# Altium PCB led_2835_curve_45X45cm.PcbDoc
Units mm, origin at the board's own origin, x right, y up, seen from the top; angles counter-clockwise.
Board outline 450 x 225 mm, 2 copper layers (Top Layer, Bottom Layer); 74 components, 68 nets, 148 pads, 0 vias.
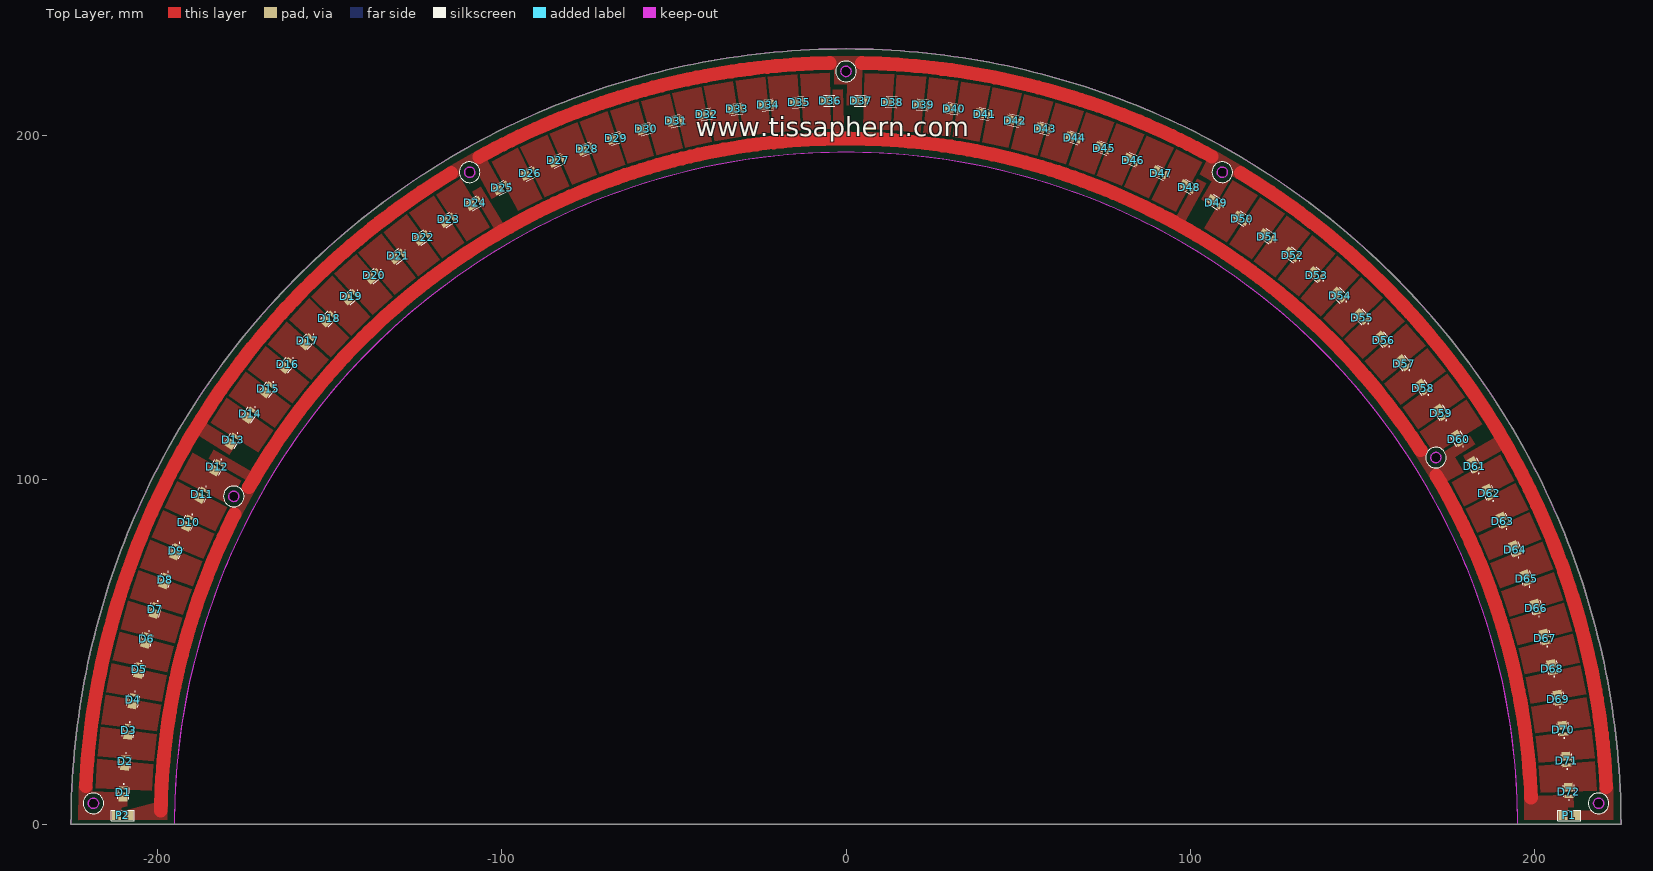
[diagram p0: Top Layer view]
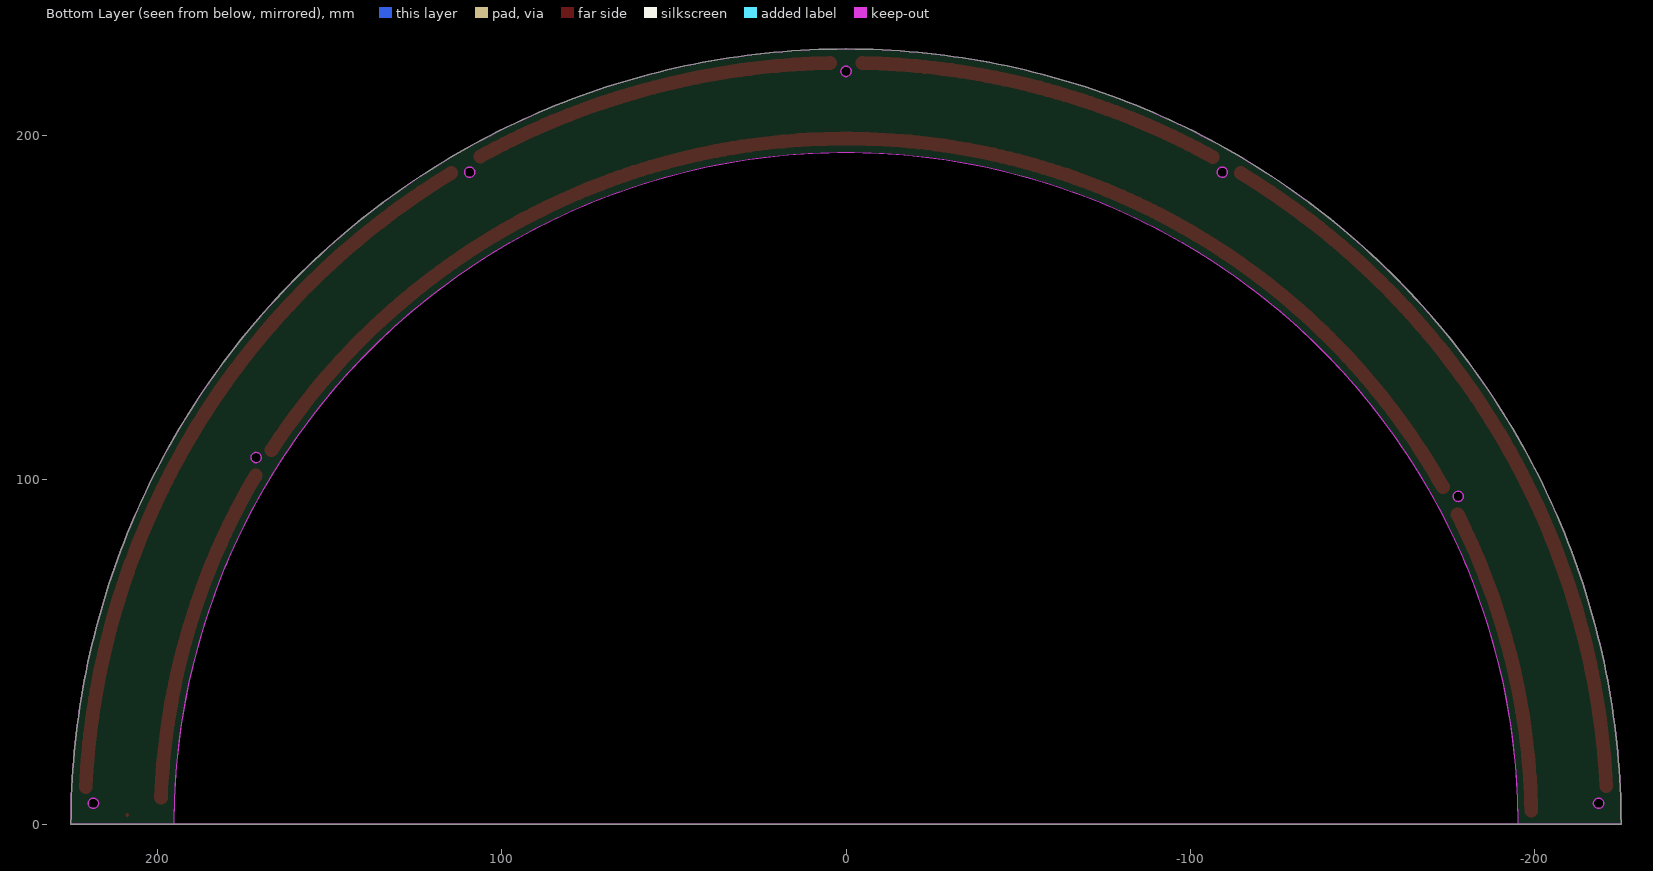
[diagram p1: Bottom Layer view, seen from below]

## Layer stack, top to bottom
Top Solder: solder mask 0.0102, Solder Resist, Dk 3.5
Top Layer: signal copper 0.0356
Dielectric 1: dielectric 0.32, FR-4, Dk 4.8
Bottom Layer: signal copper 0.0356
Bottom Solder: solder mask 0.0102, Solder Resist, Dk 3.5

## Board outline
-225,0 225,0 ccw(c0,0)
cut-out: -195,0 195,0 195,2.188 194.902,6.563 194.705,10.934 194.411,15.3 194.019,19.659 193.529,24.007 192.942,28.344 192.257,32.666 191.476,36.971 190.598,41.258 189.624,45.525 188.555,49.768 187.391,53.986 186.132,58.177 184.78,62.339 183.335,66.47 181.797,70.567 180.168,74.628 178.448,78.652 176.638,82.636 174.74,86.579 172.753,90.478 170.679,94.331 168.52,98.137 166.275,101.894 163.947,105.599 161.536,109.251 159.044,112.848 156.472,116.388 153.821,119.87 151.093,123.291 148.288,126.65 145.409,129.946 142.457,133.176 139.433,136.339 136.339,139.433 133.176,142.457 129.946,145.409 126.65,148.288 123.291,151.093 119.87,153.821 116.388,156.472 112.848,159.044 109.251,161.536 105.599,163.947 101.894,166.275 98.137,168.52 94.331,170.679 90.478,172.753 86.579,174.74 82.636,176.638 78.652,178.448 74.628,180.168 70.567,181.797 66.47,183.335 62.339,184.78 58.177,186.132 53.986,187.391 49.768,188.555 45.525,189.624 41.258,190.598 36.971,191.476 32.666,192.257 28.344,192.942 24.007,193.529 19.659,194.019 15.3,194.411 10.934,194.705 6.563,194.902 2.188,195 -2.188,195 -6.563,194.902 -10.934,194.705 -15.3,194.411 -19.659,194.019 -24.007,193.529 -28.344,192.942 -32.666,192.257 -36.971,191.476 -41.258,190.598 -45.525,189.624 -49.768,188.555 -53.986,187.391 -58.177,186.132 -62.339,184.78 -66.47,183.335 -70.567,181.797 -74.628,180.168 -78.652,178.448 -82.636,176.638 -86.579,174.74 -90.478,172.753 -94.331,170.679 -98.137,168.52 -101.894,166.275 -105.599,163.947 -109.251,161.536 -112.848,159.044 -116.388,156.472 -119.87,153.821 -123.291,151.093 -126.65,148.288 -129.946,145.409 -133.176,142.457 -136.339,139.433 -139.433,136.339 -142.457,133.176 -145.409,129.946 -148.288,126.65 -151.093,123.291 -153.821,119.87 -156.472,116.388 -159.044,112.848 -161.536,109.251 -163.947,105.599 -166.275,101.894 -168.52,98.137 -170.679,94.331 -172.753,90.478 -174.74,86.579 -176.638,82.636 -178.448,78.652 -180.168,74.628 -181.797,70.567 -183.335,66.47 -184.78,62.339 -186.132,58.177 -187.391,53.986 -188.555,49.768 -189.624,45.525 -190.598,41.258 -191.476,36.971 -192.257,32.666 -192.942,28.344 -193.529,24.007 -194.019,19.659 -194.411,15.3 -194.705,10.934 -194.902,6.563 -195,2.188
cut-out: -176.455,94.371 -176.529,94.243 -176.724,94.021 -176.958,93.841 -177.223,93.71 -177.509,93.634 -177.803,93.614 -178.096,93.653 -178.376,93.748 -178.504,93.822 -178.632,93.896 -178.854,94.09 -179.034,94.325 -179.165,94.59 -179.241,94.875 -179.261,95.17 -179.222,95.463 -179.127,95.743 -179.053,95.871 -178.979,95.999 -178.784,96.221 -178.55,96.401 -178.285,96.531 -178,96.608 -177.705,96.627 -177.412,96.589 -177.132,96.494 -177.004,96.42 -176.876,96.346 -176.654,96.151 -176.474,95.917 -176.343,95.652 -176.267,95.366 -176.248,95.072 -176.286,94.779 -176.381,94.499
cut-out: 169.955,105.629 169.881,105.757 169.786,106.037 169.748,106.33 169.767,106.625 169.843,106.91 169.974,107.175 170.154,107.41 170.376,107.604 170.504,107.678 170.632,107.752 170.912,107.847 171.205,107.886 171.5,107.866 171.785,107.79 172.05,107.659 172.284,107.479 172.479,107.257 172.553,107.129 172.627,107.001 172.722,106.721 172.761,106.428 172.741,106.134 172.665,105.848 172.534,105.583 172.354,105.349 172.132,105.154 172.004,105.08 171.876,105.006 171.596,104.911 171.303,104.873 171.009,104.892 170.723,104.969 170.458,105.099 170.224,105.279 170.029,105.501
cut-out: 217,6 217,6.148 217.058,6.438 217.171,6.711 217.335,6.956 217.544,7.165 217.789,7.329 218.062,7.442 218.352,7.5 218.5,7.5 218.648,7.5 218.938,7.442 219.211,7.329 219.456,7.165 219.665,6.956 219.829,6.711 219.942,6.438 220,6.148 220,6 220,5.852 219.942,5.562 219.829,5.289 219.665,5.044 219.456,4.835 219.211,4.671 218.938,4.558 218.648,4.5 218.5,4.5 218.352,4.5 218.062,4.558 217.789,4.671 217.544,4.835 217.335,5.044 217.171,5.289 217.058,5.562 217,5.852
cut-out: 108.5,187.928 108.372,188.001 108.15,188.196 107.97,188.431 107.839,188.696 107.763,188.981 107.744,189.276 107.782,189.569 107.877,189.849 107.951,189.977 108.025,190.104 108.22,190.327 108.454,190.507 108.719,190.637 109.004,190.714 109.299,190.733 109.592,190.694 109.872,190.599 110,190.526 110.128,190.452 110.35,190.257 110.53,190.022 110.661,189.757 110.737,189.472 110.756,189.177 110.718,188.884 110.623,188.604 110.549,188.477 110.475,188.349 110.28,188.126 110.046,187.947 109.781,187.816 109.496,187.739 109.201,187.72 108.908,187.759 108.628,187.854
cut-out: 0,217 -0.148,217 -0.438,217.058 -0.711,217.171 -0.956,217.335 -1.165,217.544 -1.329,217.789 -1.442,218.062 -1.5,218.352 -1.5,218.5 -1.5,218.648 -1.442,218.938 -1.329,219.211 -1.165,219.456 -0.956,219.665 -0.711,219.829 -0.438,219.942 -0.148,220 0,220 0.148,220 0.438,219.942 0.711,219.829 0.956,219.665 1.165,219.456 1.329,219.211 1.442,218.938 1.5,218.648 1.5,218.5 1.5,218.352 1.442,218.062 1.329,217.789 1.165,217.544 0.956,217.335 0.711,217.171 0.438,217.058 0.148,217
cut-out: -217,6 -217,5.852 -217.058,5.562 -217.171,5.289 -217.335,5.044 -217.544,4.835 -217.789,4.671 -218.062,4.558 -218.352,4.5 -218.5,4.5 -218.648,4.5 -218.938,4.558 -219.211,4.671 -219.456,4.835 -219.665,5.044 -219.829,5.289 -219.942,5.562 -220,5.852 -220,6 -220,6.148 -219.942,6.438 -219.829,6.711 -219.665,6.956 -219.456,7.165 -219.211,7.329 -218.938,7.442 -218.648,7.5 -218.5,7.5 -218.352,7.5 -218.062,7.442 -217.789,7.329 -217.544,7.165 -217.335,6.956 -217.171,6.711 -217.058,6.438 -217,6.148
cut-out: -108.5,187.928 -108.628,187.854 -108.908,187.759 -109.201,187.72 -109.496,187.739 -109.781,187.816 -110.046,187.947 -110.28,188.126 -110.475,188.349 -110.549,188.477 -110.623,188.604 -110.718,188.884 -110.756,189.177 -110.737,189.472 -110.661,189.757 -110.53,190.022 -110.35,190.257 -110.128,190.452 -110,190.526 -109.872,190.599 -109.592,190.694 -109.299,190.733 -109.004,190.714 -108.719,190.637 -108.454,190.507 -108.22,190.327 -108.025,190.104 -107.951,189.977 -107.877,189.849 -107.782,189.569 -107.744,189.276 -107.763,188.981 -107.839,188.696 -107.97,188.431 -108.15,188.196 -108.372,188.001
cut-out: 0,217 -0.148,217 -0.438,217.058 -0.711,217.171 -0.956,217.335 -1.165,217.544 -1.329,217.789 -1.442,218.062 -1.5,218.352 -1.5,218.5 -1.5,218.648 -1.442,218.938 -1.329,219.211 -1.165,219.456 -0.956,219.665 -0.711,219.829 -0.438,219.942 -0.148,220 0,220 0.148,220 0.438,219.942 0.711,219.829 0.956,219.665 1.165,219.456 1.329,219.211 1.442,218.938 1.5,218.648 1.5,218.5 1.5,218.352 1.442,218.062 1.329,217.789 1.165,217.544 0.956,217.335 0.711,217.171 0.438,217.058 0.148,217

## Design rules (kind name [scope] priority, off if disabled: settings)
Clearance [All] p1: gap=0.254 ignorepadtopadclearanceinfootprint=FALSE except(0: Arc-Hole Track-Hole SMDPad-Hole THPad-Hole Via-Hole Fill-Hole Poly-Hole Region-Hole Text-Hole)
PolygonConnect PolygonConnect_2 [All vs IsNamedPolygon('NONET_L-01_P-001')] p1: connectstyle=Direct reliefconductorwidth=0.254 reliefentries=4 polygonreliefangle="90 Angle" airgapwidth=0.254
PolygonConnect PolygonConnect_1 [All vs IsNamedPolygon('NONET_L-01_P-001')] p2: connectstyle=Relief reliefconductorwidth=2.55 reliefentries=4 polygonreliefangle="90 Angle" airgapwidth=0.2
PolygonConnect [All] p3: connectstyle=Relief reliefconductorwidth=0.254 reliefentries=4 polygonreliefangle="90 Angle" airgapwidth=0.254
RoutingVias [All] p1: holewidth=0.711 width=1.27 viastyle="Through Hole" minholewidth=0.711 minwidth=1.27 maxholewidth=0.711 maxwidth=1.27
SolderMaskExpansion [All] p1: expansion=0.102 istentingtop=FALSE
Width [All] p1: maxlimit=10 minlimit=0.254 preferedwidth=0.254
30 further rules are at their usual default settings.

## Components (designator, comment, footprint, x,y, rotation, side; value= is the part's Value field where it differs from the comment)
D1 "OF-SMD2835Y" LED_OF-SMD2835Y -209.8,9.16 r267.5 top
D2 "OF-SMD2835Y" LED_OF-SMD2835Y -209.212,18.171 r265.04 top
D3 "OF-SMD2835Y" LED_OF-SMD2835Y -208.238,27.149 r262.57 top
D4 "OF-SMD2835Y" LED_OF-SMD2835Y -206.878,36.076 r260.11 top
D5 "OF-SMD2835Y" LED_OF-SMD2835Y -205.136,44.937 r257.64 top
D6 "OF-SMD2835Y" LED_OF-SMD2835Y -203.014,53.714 r255.18 top
D7 "OF-SMD2835Y" LED_OF-SMD2835Y -200.517,62.393 r252.72 top
D8 "OF-SMD2835Y" LED_OF-SMD2835Y -197.649,70.956 r250.25 top
D9 "OF-SMD2835Y" LED_OF-SMD2835Y -194.416,79.387 r247.79 top
D10 "OF-SMD2835Y" LED_OF-SMD2835Y -190.823,87.672 r245.32 top
D11 "OF-SMD2835Y" LED_OF-SMD2835Y -186.878,95.795 r242.86 top
D12 "OF-SMD2835Y" LED_OF-SMD2835Y -182.587,103.741 r240.4 top
D13 "OF-SMD2835Y" LED_OF-SMD2835Y -177.958,111.494 r237.93 top
D14 "OF-SMD2835Y" LED_OF-SMD2835Y -173,119.042 r235.47 top
D15 "OF-SMD2835Y" LED_OF-SMD2835Y -167.722,126.369 r233 top
D16 "OF-SMD2835Y" LED_OF-SMD2835Y -162.134,133.463 r230.54 top
D17 "OF-SMD2835Y" LED_OF-SMD2835Y -156.247,140.31 r228.08 top
D18 "OF-SMD2835Y" LED_OF-SMD2835Y -150.07,146.898 r225.61 top
D19 "OF-SMD2835Y" LED_OF-SMD2835Y -143.616,153.214 r223.15 top
D20 "OF-SMD2835Y" LED_OF-SMD2835Y -136.896,159.246 r220.68 top
D21 "OF-SMD2835Y" LED_OF-SMD2835Y -129.923,164.985 r218.22 top
D22 "OF-SMD2835Y" LED_OF-SMD2835Y -122.71,170.418 r215.76 top
D23 "OF-SMD2835Y" LED_OF-SMD2835Y -115.27,175.536 r213.29 top
D24 "OF-SMD2835Y" LED_OF-SMD2835Y -107.617,180.329 r210.83 top
D25 "OF-SMD2835Y" LED_OF-SMD2835Y -99.765,184.789 r208.36 top
D26 "OF-SMD2835Y" LED_OF-SMD2835Y -91.728,188.907 r205.9 top
D27 "OF-SMD2835Y" LED_OF-SMD2835Y -83.522,192.676 r203.44 top
D28 "OF-SMD2835Y" LED_OF-SMD2835Y -75.161,196.089 r200.97 top
D29 "OF-SMD2835Y" LED_OF-SMD2835Y -66.662,199.139 r198.51 top
D30 "OF-SMD2835Y" LED_OF-SMD2835Y -58.039,201.82 r196.04 top
D31 "OF-SMD2835Y" LED_OF-SMD2835Y -49.309,204.129 r193.58 top
D32 "OF-SMD2835Y" LED_OF-SMD2835Y -40.487,206.06 r191.12 top
D33 "OF-SMD2835Y" LED_OF-SMD2835Y -31.591,207.61 r188.65 top
D34 "OF-SMD2835Y" LED_OF-SMD2835Y -22.636,208.776 r186.19 top
D35 "OF-SMD2835Y" LED_OF-SMD2835Y -13.64,209.557 r183.72 top
D36 "OF-SMD2835Y" LED_OF-SMD2835Y -4.618,209.949 r181.26 top
D37 "OF-SMD2835Y" LED_OF-SMD2835Y 4.413,209.954 r178.8 top
D38 "OF-SMD2835Y" LED_OF-SMD2835Y 13.435,209.57 r176.33 top
D39 "OF-SMD2835Y" LED_OF-SMD2835Y 22.432,208.798 r173.87 top
D40 "OF-SMD2835Y" LED_OF-SMD2835Y 31.388,207.641 r171.4 top
D41 "OF-SMD2835Y" LED_OF-SMD2835Y 40.286,206.1 r168.94 top
D42 "OF-SMD2835Y" LED_OF-SMD2835Y 49.109,204.177 r166.48 top
D43 "OF-SMD2835Y" LED_OF-SMD2835Y 57.842,201.877 r164.01 top
D44 "OF-SMD2835Y" LED_OF-SMD2835Y 66.467,199.204 r161.55 top
D45 "OF-SMD2835Y" LED_OF-SMD2835Y 74.97,196.162 r159.08 top
D46 "OF-SMD2835Y" LED_OF-SMD2835Y 83.334,192.758 r156.62 top
D47 "OF-SMD2835Y" LED_OF-SMD2835Y 91.544,188.997 r154.16 top
D48 "OF-SMD2835Y" LED_OF-SMD2835Y 99.584,184.886 r151.69 top
D49 "OF-SMD2835Y" LED_OF-SMD2835Y 107.441,180.434 r149.23 top
D50 "OF-SMD2835Y" LED_OF-SMD2835Y 115.099,175.648 r146.76 top
D51 "OF-SMD2835Y" LED_OF-SMD2835Y 122.544,170.538 r144.3 top
D52 "OF-SMD2835Y" LED_OF-SMD2835Y 129.762,165.112 r141.84 top
D53 "OF-SMD2835Y" LED_OF-SMD2835Y 136.74,159.38 r139.37 top
D54 "OF-SMD2835Y" LED_OF-SMD2835Y 143.466,153.354 r136.91 top
D55 "OF-SMD2835Y" LED_OF-SMD2835Y 149.926,147.044 r134.44 top
D56 "OF-SMD2835Y" LED_OF-SMD2835Y 156.109,140.463 r131.98 top
D57 "OF-SMD2835Y" LED_OF-SMD2835Y 162.004,133.622 r129.52 top
D58 "OF-SMD2835Y" LED_OF-SMD2835Y 167.599,126.533 r127.05 top
D59 "OF-SMD2835Y" LED_OF-SMD2835Y 172.884,119.211 r124.59 top
D60 "OF-SMD2835Y" LED_OF-SMD2835Y 177.849,111.668 r122.12 top
D61 "OF-SMD2835Y" LED_OF-SMD2835Y 182.485,103.919 r119.66 top
D62 "OF-SMD2835Y" LED_OF-SMD2835Y 186.784,95.978 r117.2 top
D63 "OF-SMD2835Y" LED_OF-SMD2835Y 190.738,87.859 r114.73 top
D64 "OF-SMD2835Y" LED_OF-SMD2835Y 194.339,79.577 r112.27 top
D65 "OF-SMD2835Y" LED_OF-SMD2835Y 197.58,71.149 r109.8 top
D66 "OF-SMD2835Y" LED_OF-SMD2835Y 200.456,62.589 r107.34 top
D67 "OF-SMD2835Y" LED_OF-SMD2835Y 202.962,53.913 r104.88 top
D68 "OF-SMD2835Y" LED_OF-SMD2835Y 205.092,45.137 r102.41 top
D69 "OF-SMD2835Y" LED_OF-SMD2835Y 206.843,36.278 r99.95 top
D70 "OF-SMD2835Y" LED_OF-SMD2835Y 208.211,27.352 r97.48 top
D71 "OF-SMD2835Y" LED_OF-SMD2835Y 209.194,18.376 r95.02 top
D72 "OF-SMD2835Y" LED_OF-SMD2835Y 209.791,9.365 r92.56 top
P1 "Header 2" HDR1X2_SMD 210,2.5 r180 top
P2 "Header 2" HDR1X2_SMD -210,2.5 r0 top

## Footprints (in the part's own frame and the unit in brackets; to place one, negate y for a bottom-side part, rotate by r counter-clockwise, add the part's x,y. Pads: shape width x height; smd on the part's side, far side on the other; paste and mask are expansions set on the pad)
HDR1X2_SMD [mm] "Connector; Header; 2 Position"
  rect 2.6x2.55 smd: 1(-1.778,0) 2(1.778,0)
  silkscreen extent -3.33,-1.5 3.33,1.5
LED_OF-SMD2835Y [mm]
  rect 2.6x2.55 smd: A(1.325,0)
  rect 1x2.55 smd: C(-1.325,0)
  silkscreen extent -2.52,-1.6 1.92,1.59

## Part data
D1 D2 D3 D4 D5 D6 D7 D8 D9 D10 D11 D12 D13 D14 D15 D16 D17 D18 D19 D20 D21 D22 D23 D24 D25 D26 D27 D28 D29 D30 D31 D32 D33 D34 D35 D36 D37 D38 D39 D40 D41 D42 D43 D44 D45 D46 D47 D48 D49 D50 D51 D52 D53 D54 D55 D56 D57 D58 D59 D60 D61 D62 D63 D64 D65 D66 D67 D68 D69 D70 D71 D72: "LED; SMD; 2835, PLCC2; yellow; 2200-2800mcd; 2.8x3.5x0.75mm; 120Â°"
P1 P2: "Header, 2-Pin"

## Nets (pads, with @x,y where several pads share a name; then routed paths per layer and width w, separated by ;. In a path a pad name is that pad's centre, name@x,y a point inside that pad or via, vN(x,y) a via of type N, cw(c..) or ccw(c..) an arc to the next point about the centre after c; other vN are vias at no path point)
GND: D12.C D24.C D36.C D48.C D60.C D72.C P1.2 P2.2 | length 596.2
  Top Layer w1: P1.2@208.73,2.5 P1.2@208.73,2.635
  Top Layer w4: -198.963,3.85 cw(c0,0) -177.549,89.873 ; -173.297,97.821 cw(c0,0) 166.774,108.57 ; 171.346,101.237 cw(c0.022,0) 198.875,7.637
NetD1_C: D1.C D2.A
NetD2_C: D2.C D3.A
NetD3_C: D3.C D4.A
NetD4_C: D4.C D5.A
NetD5_C: D5.C D6.A
NetD6_C: D6.C D7.A
NetD7_C: D7.C D8.A
NetD8_C: D8.C D9.A
NetD9_C: D9.C D10.A
NetD10_C: D10.C D11.A
NetD11_C: D11.C D12.A
NetD13_C: D13.C D14.A
NetD14_C: D14.C D15.A
NetD15_C: D15.C D16.A
NetD16_C: D16.C D17.A
NetD17_C: D17.C D18.A
NetD18_C: D18.C D19.A
NetD19_C: D19.C D20.A
NetD20_C: D20.C D21.A
NetD21_C: D21.C D22.A
NetD22_C: D22.C D23.A
NetD23_C: D23.C D24.A
NetD25_C: D25.C D26.A
NetD26_C: D26.C D27.A
NetD27_C: D27.C D28.A
NetD28_C: D28.C D29.A
NetD29_C: D29.C D30.A
NetD30_C: D30.C D31.A
NetD31_C: D31.C D32.A
NetD32_C: D32.C D33.A
NetD33_C: D33.C D34.A
NetD34_C: D34.C D35.A
NetD35_C: D35.C D36.A
NetD37_C: D37.C D38.A
NetD38_C: D38.C D39.A
NetD39_C: D39.C D40.A
NetD40_C: D40.C D41.A
NetD41_C: D41.C D42.A
NetD42_C: D42.C D43.A
NetD43_C: D43.C D44.A
NetD44_C: D44.C D45.A
NetD45_C: D45.C D46.A
NetD46_C: D46.C D47.A
NetD47_C: D47.C D48.A
NetD49_C: D49.C D50.A
NetD50_C: D50.C D51.A
NetD51_C: D51.C D52.A
NetD52_C: D52.C D53.A
NetD53_C: D53.C D54.A
NetD54_C: D54.C D55.A
NetD55_C: D55.C D56.A
NetD56_C: D56.C D57.A
NetD57_C: D57.C D58.A
NetD58_C: D58.C D59.A
NetD59_C: D59.C D60.A
NetD61_C: D61.C D62.A
NetD62_C: D62.C D63.A
NetD63_C: D63.C D64.A
NetD64_C: D64.C D65.A
NetD65_C: D65.C D66.A
NetD66_C: D66.C D67.A
NetD67_C: D67.C D68.A
NetD68_C: D68.C D69.A
NetD69_C: D69.C D70.A
NetD70_C: D70.C D71.A
NetD71_C: D71.C D72.A
VCC: D1.A D13.A D25.A D37.A D49.A D61.A P1.1 P2.1 | length 644.1
  Top Layer w4: -220.73,10.93 cw(c0,0) -114.581,188.977 ; -106.476,193.659 cw(c0,0) -4.756,220.949 ; 4.678,220.95 cw(c0,0) 106.172,193.826 ; 114.577,188.979 cw(c0,0) 220.737,10.781

## Polygon pours and split planes (outlines as drawn)
GND on Top Layer "NONET_L-01_P-001" (solid, remove dead copper, pour order 377): 175.265,109.079 179.336,102.136 172.991,98.637 169.083,105.227
VCC on Top Layer "NONET_L-01_P-001" (solid, remove dead copper, pour order 376): -218.736,10.807 -218.87,9.192 -222.73,9.369 -222.721,11.001
GND on Top Layer "NONET_L-01_P-001" (solid, remove dead copper, pour order 375): 181.026,112.694 182.627,110.188 169.848,102.131 168.268,104.65
VCC on Top Layer "NONET_L-01_P-001" (solid, remove dead copper, pour order 374): 190.785,113.53 179.209,106.902 181.279,103.26 192.882,109.884
GND on Top Layer "NONET_L-01_P-001" (solid, remove dead copper, pour order 373): 101.903,187.391 104.519,185.975 97.248,172.732 94.645,174.169
VCC on Top Layer "NONET_L-01_P-001" (solid, remove dead copper, pour order 372): 110.034,192.853 103.123,181.444 106.698,179.261 113.635,190.68
GND on Top Layer "NONET_L-01_P-001" (solid, remove dead copper, pour order 371): -185.016,106.083 -183.555,108.673 -170.441,101.172 -171.923,98.595
VCC on Top Layer "NONET_L-01_P-001" (solid, remove dead copper, pour order 370): -190.335,114.307 -179.049,107.198 -176.804,110.735 -188.1,117.87
GND on Top Layer "NONET_L-01_P-001" (solid, remove dead copper, pour order 369): -108.568,183.489 -106.034,185.047 -98.201,172.128 -100.747,170.593
VCC on Top Layer "NONET_L-01_P-001" (solid, remove dead copper, pour order 368): -109.233,193.261 -102.808,181.572 -99.13,183.577 -105.551,195.294
GND on Top Layer "NONET_L-01_P-001" (solid, remove dead copper, pour order 367): -3.861,213.219 -0.888,213.301 -0.564,198.197 -3.536,198.14
VCC on Top Layer "NONET_L-01_P-001" (solid, remove dead copper, pour order 366): 0.449,222.015 0.168,208.679 4.356,208.577 4.654,221.934
GND on Top Layer "NONET_L-01_P-001" (solid, remove dead copper, pour order 365): 211.078,8.59 211.269,4.929 207.096,4.801 207.083,8.426
GND on Top Layer "NONET_L-01_P-001" (solid, remove dead copper, pour order 177): -175.165,98.547 -179.195,91.014 -175.668,89.149 -171.658,96.718
NetD71_C on Top Layer "NONET_L-01_P-001" (solid, remove dead copper, pour order 356): 217.319,18.257 217.951,9.72 201.641,9.053 201.141,16.847
NetD70_C on Top Layer "NONET_L-01_P-001" (solid, remove dead copper, pour order 355): 216.333,27.583 217.332,19.081 201.066,17.714 200.231,25.479
NetD69_C on Top Layer "NONET_L-01_P-001" (solid, remove dead copper, pour order 354): 214.947,36.858 216.311,28.406 200.118,26.341 198.95,34.064
NetD68_C on Top Layer "NONET_L-01_P-001" (solid, remove dead copper, pour order 353): 213.164,46.065 214.889,37.68 198.801,34.92 197.302,42.586
NetD67_C on Top Layer "NONET_L-01_P-001" (solid, remove dead copper, pour order 352): 210.987,55.186 213.071,46.883 197.116,43.435 195.289,51.028
NetD66_C on Top Layer "NONET_L-01_P-001" (solid, remove dead copper, pour order 351): 208.419,64.206 210.858,56 195.066,51.869 192.914,59.377
NetD65_C on Top Layer "NONET_L-01_P-001" (solid, remove dead copper, pour order 350): 205.466,73.107 208.256,65.014 192.656,60.207 190.183,67.616
NetD64_C on Top Layer "NONET_L-01_P-001" (solid, remove dead copper, pour order 349): 202.133,81.873 205.268,73.907 189.889,68.434 187.1,75.73
NetD63_C on Top Layer "NONET_L-01_P-001" (solid, remove dead copper, pour order 348): 198.426,90.487 201.901,82.663 186.772,76.535 183.672,83.703
NetD62_C on Top Layer "NONET_L-01_P-001" (solid, remove dead copper, pour order 347): 194.353,98.934 198.16,91.267 183.309,84.493 179.903,91.522
NetD61_C on Top Layer "NONET_L-01_P-001" (solid, remove dead copper, pour order 346): 189.92,107.198 194.054,99.702 179.507,92.296 175.802,99.172
NetD59_C on Top Layer "NONET_L-01_P-001" (solid, remove dead copper, pour order 344): 180.009,123.117 184.771,116.003 170.914,107.375 166.633,113.908
NetD58_C on Top Layer "NONET_L-01_P-001" (solid, remove dead copper, pour order 343): 174.549,130.742 179.613,123.84 166.14,114.624 161.582,120.966
NetD57_C on Top Layer "NONET_L-01_P-001" (solid, remove dead copper, pour order 342): 168.767,138.125 174.123,131.447 161.059,121.66 156.232,127.801
NetD56_C on Top Layer "NONET_L-01_P-001" (solid, remove dead copper, pour order 341): 162.673,145.253 168.311,138.811 155.679,128.472 150.593,134.4
NetD55_C on Top Layer "NONET_L-01_P-001" (solid, remove dead copper, pour order 340): 156.278,152.112 162.188,145.919 150.012,135.046 144.676,140.749
NetD54_C on Top Layer "NONET_L-01_P-001" (solid, remove dead copper, pour order 339): 149.594,158.69 155.765,152.757 144.068,141.371 138.491,146.839
NetD53_C on Top Layer "NONET_L-01_P-001" (solid, remove dead copper, pour order 338): 142.633,164.975 149.053,159.312 137.857,147.434 132.05,152.657
NetD52_C on Top Layer "NONET_L-01_P-001" (solid, remove dead copper, pour order 337): 135.409,170.954 142.066,165.573 131.391,153.224 125.365,158.193
NetD51_C on Top Layer "NONET_L-01_P-001" (solid, remove dead copper, pour order 336): 127.934,176.618 134.817,171.527 124.682,158.731 118.448,163.437
NetD50_C on Top Layer "NONET_L-01_P-001" (solid, remove dead copper, pour order 335): 120.223,181.954 127.318,177.165 117.743,163.945 111.312,168.378
NetD49_C on Top Layer "NONET_L-01_P-001" (solid, remove dead copper, pour order 334): 112.289,186.955 119.584,182.475 110.585,168.855 103.971,173.008
NetD47_C on Top Layer "NONET_L-01_P-001" (solid, remove dead copper, pour order 332): 95.814,195.91 103.466,192.073 95.671,177.73 88.724,181.3
NetD46_C on Top Layer "NONET_L-01_P-001" (solid, remove dead copper, pour order 331): 87.303,199.848 95.113,196.343 87.942,181.679 80.848,184.946
NetD45_C on Top Layer "NONET_L-01_P-001" (solid, remove dead copper, pour order 330): 78.63,203.416 86.584,200.251 80.05,185.292 72.822,188.251
NetD44_C on Top Layer "NONET_L-01_P-001" (solid, remove dead copper, pour order 329): 69.812,206.609 77.895,203.788 72.01,188.562 64.661,191.208
NetD43_C on Top Layer "NONET_L-01_P-001" (solid, remove dead copper, pour order 328): 60.865,209.419 69.062,206.949 63.837,191.484 56.381,193.811
NetD42_C on Top Layer "NONET_L-01_P-001" (solid, remove dead copper, pour order 327): 51.806,211.842 60.101,209.726 55.546,194.051 47.997,196.056
NetD41_C on Top Layer "NONET_L-01_P-001" (solid, remove dead copper, pour order 326): 42.65,213.873 51.029,212.116 47.152,196.26 39.524,197.938
NetD40_C on Top Layer "NONET_L-01_P-001" (solid, remove dead copper, pour order 325): 33.416,215.509 41.862,214.114 38.671,198.105 30.978,199.454
NetD39_C on Top Layer "NONET_L-01_P-001" (solid, remove dead copper, pour order 324): 24.12,216.747 32.618,215.716 30.118,199.585 22.374,200.602
NetD38_C on Top Layer "NONET_L-01_P-001" (solid, remove dead copper, pour order 323): 14.78,217.583 23.314,216.919 21.51,200.695 13.729,201.378
NetD37_C on Top Layer "NONET_L-01_P-001" (solid, remove dead copper, pour order 322): 5.412,218.017 13.967,217.72 12.861,201.434 5.059,201.782
NetD35_C on Top Layer "NONET_L-01_P-001" (solid, remove dead copper, pour order 320): -13.337,217.676 -4.788,218.115 -4.49,201.794 -12.294,201.471
NetD34_C on Top Layer "NONET_L-01_P-001" (solid, remove dead copper, pour order 319): -22.683,216.902 -14.16,217.708 -13.161,201.415 -20.944,200.756
NetD33_C on Top Layer "NONET_L-01_P-001" (solid, remove dead copper, pour order 318): -31.987,215.726 -23.507,216.898 -21.808,200.663 -29.555,199.67
NetD32_C on Top Layer "NONET_L-01_P-001" (solid, remove dead copper, pour order 317): -41.232,214.151 -32.81,215.687 -30.415,199.54 -38.112,198.215
NetD31_C on Top Layer "NONET_L-01_P-001" (solid, remove dead copper, pour order 316): -50.4,212.181 -42.052,214.077 -38.965,198.048 -46.598,196.393
NetD30_C on Top Layer "NONET_L-01_P-001" (solid, remove dead copper, pour order 315): -59.476,209.818 -51.217,212.071 -47.444,196.189 -54.999,194.208
NetD29_C on Top Layer "NONET_L-01_P-001" (solid, remove dead copper, pour order 314): -68.441,207.067 -60.287,209.673 -55.834,193.968 -63.297,191.664
NetD28_C on Top Layer "NONET_L-01_P-001" (solid, remove dead copper, pour order 313): -77.28,203.933 -69.245,206.887 -64.122,191.388 -71.479,188.765
NetD27_C on Top Layer "NONET_L-01_P-001" (solid, remove dead copper, pour order 312): -85.976,200.422 -78.076,203.719 -72.291,188.455 -79.528,185.518
NetD26_C on Top Layer "NONET_L-01_P-001" (solid, remove dead copper, pour order 311): -94.513,196.54 -86.762,200.174 -80.326,185.173 -87.43,181.927
NetD25_C on Top Layer "NONET_L-01_P-001" (solid, remove dead copper, pour order 310): -102.875,192.295 -95.287,196.259 -88.212,181.548 -95.171,178
NetD23_C on Top Layer "NONET_L-01_P-001" (solid, remove dead copper, pour order 308): -119.014,182.747 -111.794,187.348 -103.482,173.299 -110.11,169.167
NetD22_C on Top Layer "NONET_L-01_P-001" (solid, remove dead copper, pour order 307): -126.76,177.462 -119.745,182.368 -110.837,168.69 -117.281,164.277
NetD21_C on Top Layer "NONET_L-01_P-001" (solid, remove dead copper, pour order 306): -134.273,171.848 -127.475,177.052 -117.987,163.769 -124.235,159.083
NetD20_C on Top Layer "NONET_L-01_P-001" (solid, remove dead copper, pour order 305): -141.536,165.917 -134.969,171.408 -124.918,158.545 -130.959,153.595
NetD19_C on Top Layer "NONET_L-01_P-001" (solid, remove dead copper, pour order 304): -148.539,159.678 -142.213,165.447 -131.619,153.028 -137.441,147.822
NetD18_C on Top Layer "NONET_L-01_P-001" (solid, remove dead copper, pour order 303): -155.266,153.145 -149.195,159.18 -138.076,147.228 -143.669,141.777
NetD17_C on Top Layer "NONET_L-01_P-001" (solid, remove dead copper, pour order 302): -161.706,146.328 -155.9,152.618 -144.278,141.156 -149.632,135.469
NetD16_C on Top Layer "NONET_L-01_P-001" (solid, remove dead copper, pour order 301): -167.848,139.241 -162.317,145.775 -150.213,134.823 -155.317,128.911
NetD15_C on Top Layer "NONET_L-01_P-001" (solid, remove dead copper, pour order 300): -173.679,131.896 -168.434,138.662 -155.87,128.24 -160.716,122.115
NetD14_C on Top Layer "NONET_L-01_P-001" (solid, remove dead copper, pour order 299): -179.189,124.307 -174.24,131.292 -161.24,121.42 -165.817,115.092
NetD13_C on Top Layer "NONET_L-01_P-001" (solid, remove dead copper, pour order 298): -184.367,116.489 -179.723,123.68 -166.311,114.376 -170.612,107.857
NetD11_C on Top Layer "NONET_L-01_P-001" (solid, remove dead copper, pour order 296): -193.692,100.22 -189.683,107.784 -175.521,99.667 -179.247,92.802
NetD10_C on Top Layer "NONET_L-01_P-001" (solid, remove dead copper, pour order 295): -197.822,91.8 -194.142,99.53 -179.644,92.029 -183.071,85.01
NetD9_C on Top Layer "NONET_L-01_P-001" (solid, remove dead copper, pour order 294): -201.586,83.211 -198.241,91.091 -183.434,84.22 -186.556,77.061
NetD8_C on Top Layer "NONET_L-01_P-001" (solid, remove dead copper, pour order 293): -204.977,74.467 -201.974,82.484 -186.885,76.256 -189.697,68.97
NetD7_C on Top Layer "NONET_L-01_P-001" (solid, remove dead copper, pour order 292): -207.989,65.586 -205.334,73.725 -189.991,68.151 -192.486,60.75
NetD6_C on Top Layer "NONET_L-01_P-001" (solid, remove dead copper, pour order 291): -210.616,56.584 -208.313,64.829 -192.745,59.92 -194.92,52.419
NetD5_C on Top Layer "NONET_L-01_P-001" (solid, remove dead copper, pour order 290): -212.854,47.477 -210.908,55.813 -195.143,51.578 -196.993,43.991
NetD4_C on Top Layer "NONET_L-01_P-001" (solid, remove dead copper, pour order 289): -214.698,38.282 -213.112,46.694 -197.18,43.141 -198.703,35.481
NetD3_C on Top Layer "NONET_L-01_P-001" (solid, remove dead copper, pour order 288): -216.146,29.016 -214.923,37.489 -198.852,34.624 -200.044,26.905
NetD2_C on Top Layer "NONET_L-01_P-001" (solid, remove dead copper, pour order 287): -217.193,19.697 -216.336,28.215 -200.157,26.043 -201.016,18.28
NetD1_C on Top Layer "NONET_L-01_P-001" (solid, remove dead copper, pour order 286): -217.839,10.341 -217.349,18.888 -201.092,17.414 -201.616,9.621
VCC on Top Layer "NONET_L-01_P-001" (solid, remove dead copper, pour order 285): -210.512,1.298 -222.938,1.111 -222.832,5.105 -210.478,5.202
VCC on Top Layer "NONET_L-01_P-001" (solid, remove dead copper, pour order 283): -208.53,9.072 -222.72,9.724 -222.931,1.358 -208.697,5.194
VCC on Top Layer "NONET_L-01_P-001" (solid, remove dead copper, pour order 190): 109.828,184.495 102.692,188.688 105.755,194.619 113.515,190.439
NetD1_C on Top Layer "NONET_L-01_P-001" (solid, remove dead copper, pour order 197): -217.839,10.341 -217.349,18.888 -201.092,17.414 -201.616,9.621
VCC on Top Layer "NONET_L-01_P-001" (solid, remove dead copper, pour order 192): 222.731,1.172 222.731,10.75 218.753,10.516 219.007,1.189
VCC on Top Layer "NONET_L-01_P-001" (solid, remove dead copper, pour order 191): 4.562,214.726 -3.415,214.726 -3.415,222.308 4.809,222.551
VCC on Top Layer "NONET_L-01_P-001" (solid, remove dead copper, pour order 160): -115.666,190.658 -107.541,195.332 -105.549,191.895 -113.612,187.224
VCC on Top Layer "NONET_L-01_P-001" (solid, remove dead copper, pour order 171): -4.78,222.948 4.6,222.948 3.898,218.975 -4.708,218.953
VCC on Top Layer "NONET_L-01_P-001" (solid, remove dead copper, pour order 165): 115.351,190.805 113.379,187.377 105.388,191.984 107.36,195.405
GND on Top Layer "NONET_L-01_P-001" (solid, remove dead copper, pour order 176): 168.407,109.694 173.143,102.127 169.553,100.348 165.127,107.436
VCC on Top Layer "NONET_L-01_P-001" (solid, remove dead copper, pour order 167): 210.45,3.808 222.734,3.84 222.734,1.216 210.443,1.19
GND on Top Layer "NONET_L-01_P-001" (solid, remove dead copper, pour order 175): 196.984,1.187 209.515,1.232 209.515,8.527 196.865,8.049
GND on Top Layer "NONET_L-01_P-001" (solid, remove dead copper, pour order 172): -209.528,3.787 -196.899,7.157 -197.056,1.205 -209.511,1.231

## Keep-outs
Keep-Out Layer:
  circle w0.2: c-177.754,95.121 r1.5
  circle w0.2: c171.254,106.379 r1.5
  circle w0.2: c218.5,6 r1.5
  circle w0.2: c109.25,189.227 r1.5
  circle w0.2: c0,218.5 r1.5
  circle w0.2: c-218.5,6 r1.5
  circle w0.2: c-109.25,189.227 r1.5
  circle w0.2: c0,218.5 r1.5
  lines w0.2: -225,0 cw(c0,0) 225,0 -225,0 ; -195,0 cw(c0,0) 195,0 -195,0

## Other copper
Multi-Layer:
  pour cut-out: -218.5,3 -218.697,3 -219.087,3.051 -219.466,3.153 -219.83,3.304 -220.17,3.5 -220.482,3.74 -220.76,4.018 -221,4.33 -221.196,4.67 -221.347,5.034 -221.449,5.413 -221.5,5.803 -221.5,6 -221.5,6.197 -221.449,6.587 -221.347,6.966 -221.196,7.33 -221,7.67 -220.76,7.982 -220.482,8.26 -220.17,8.5 -219.83,8.696 -219.466,8.847 -219.087,8.949 -218.697,9 -218.5,9 -218.303,9 -217.913,8.949 -217.534,8.847 -217.17,8.696 -216.83,8.5 -216.518,8.26 -216.24,7.982 -216,7.67 -215.804,7.33 -215.653,6.966 -215.551,6.587 -215.5,6.197 -215.5,6 -215.5,5.803 -215.551,5.413 -215.653,5.034 -215.804,4.67 -216,4.33 -216.24,4.018 -216.518,3.74 -216.83,3.5 -217.17,3.304 -217.534,3.153 -217.913,3.051 -218.303,3
  pour cut-out: 215.5,6 215.5,5.803 215.551,5.413 215.653,5.034 215.804,4.67 216,4.33 216.24,4.018 216.518,3.74 216.83,3.5 217.17,3.304 217.534,3.153 217.913,3.051 218.303,3 218.5,3 218.697,3 219.087,3.051 219.466,3.153 219.83,3.304 220.17,3.5 220.482,3.74 220.76,4.018 221,4.33 221.196,4.67 221.347,5.034 221.449,5.413 221.5,5.803 221.5,6 221.5,6.197 221.449,6.587 221.347,6.966 221.196,7.33 221,7.67 220.76,7.982 220.482,8.26 220.17,8.5 219.83,8.696 219.466,8.847 219.087,8.949 218.697,9 218.5,9 218.303,9 217.913,8.949 217.534,8.847 217.17,8.696 216.83,8.5 216.518,8.26 216.24,7.982 216,7.67 215.804,7.33 215.653,6.966 215.551,6.587 215.5,6.197
  pour cut-out: 168.254,106.379 168.254,106.183 168.305,105.793 168.407,105.413 168.558,105.049 168.754,104.709 168.994,104.397 169.272,104.119 169.584,103.879 169.924,103.683 170.288,103.532 170.668,103.43 171.057,103.379 171.254,103.379 171.451,103.379 171.841,103.43 172.221,103.532 172.584,103.683 172.924,103.879 173.236,104.119 173.514,104.397 173.754,104.709 173.951,105.049 174.101,105.413 174.203,105.793 174.254,106.183 174.254,106.379 174.254,106.576 174.203,106.966 174.101,107.346 173.951,107.709 173.754,108.049 173.514,108.361 173.236,108.64 172.924,108.879 172.584,109.076 172.221,109.226 171.841,109.328 171.451,109.379 171.254,109.379 171.057,109.379 170.668,109.328 170.288,109.226 169.924,109.076 169.584,108.879 169.272,108.64 168.994,108.361 168.754,108.049 168.558,107.709 168.407,107.346 168.305,106.966 168.254,106.576
  pour cut-out: 109.25,186.227 109.053,186.227 108.663,186.278 108.284,186.38 107.92,186.53 107.58,186.727 107.268,186.966 106.99,187.244 106.75,187.556 106.554,187.897 106.403,188.26 106.301,188.64 106.25,189.03 106.25,189.227 106.25,189.423 106.301,189.813 106.403,190.193 106.554,190.556 106.75,190.897 106.99,191.209 107.268,191.487 107.58,191.726 107.92,191.923 108.284,192.073 108.663,192.175 109.053,192.227 109.25,192.227 109.447,192.227 109.837,192.175 110.216,192.073 110.58,191.923 110.92,191.726 111.232,191.487 111.51,191.209 111.75,190.897 111.946,190.556 112.097,190.193 112.199,189.813 112.25,189.423 112.25,189.227 112.25,189.03 112.199,188.64 112.097,188.26 111.946,187.897 111.75,187.556 111.51,187.244 111.232,186.966 110.92,186.727 110.58,186.53 110.216,186.38 109.837,186.278 109.447,186.227
  pour cut-out: -177.754,92.121 -177.951,92.121 -178.341,92.172 -178.721,92.274 -179.084,92.424 -179.424,92.621 -179.736,92.86 -180.014,93.139 -180.254,93.451 -180.451,93.791 -180.601,94.154 -180.703,94.534 -180.754,94.924 -180.754,95.121 -180.754,95.317 -180.703,95.707 -180.601,96.087 -180.451,96.451 -180.254,96.791 -180.014,97.103 -179.736,97.381 -179.424,97.621 -179.084,97.817 -178.721,97.968 -178.341,98.07 -177.951,98.121 -177.754,98.121 -177.557,98.121 -177.168,98.07 -176.788,97.968 -176.424,97.817 -176.084,97.621 -175.772,97.381 -175.494,97.103 -175.254,96.791 -175.058,96.451 -174.907,96.087 -174.805,95.707 -174.754,95.317 -174.754,95.121 -174.754,94.924 -174.805,94.534 -174.907,94.154 -175.058,93.791 -175.254,93.451 -175.494,93.139 -175.772,92.86 -176.084,92.621 -176.424,92.424 -176.788,92.274 -177.168,92.172 -177.557,92.121
  pour cut-out: -109.25,186.227 -109.447,186.227 -109.837,186.278 -110.216,186.38 -110.58,186.53 -110.92,186.727 -111.232,186.966 -111.51,187.244 -111.75,187.556 -111.946,187.897 -112.097,188.26 -112.199,188.64 -112.25,189.03 -112.25,189.227 -112.25,189.423 -112.199,189.813 -112.097,190.193 -111.946,190.556 -111.75,190.897 -111.51,191.209 -111.232,191.487 -110.92,191.726 -110.58,191.923 -110.216,192.073 -109.837,192.175 -109.447,192.227 -109.25,192.227 -109.053,192.227 -108.663,192.175 -108.284,192.073 -107.92,191.923 -107.58,191.726 -107.268,191.487 -106.99,191.209 -106.75,190.897 -106.554,190.556 -106.403,190.193 -106.301,189.813 -106.25,189.423 -106.25,189.227 -106.25,189.03 -106.301,188.64 -106.403,188.26 -106.554,187.897 -106.75,187.556 -106.99,187.244 -107.268,186.966 -107.58,186.727 -107.92,186.53 -108.284,186.38 -108.663,186.278 -109.053,186.227
  pour cut-out: 0,215.5 -0.197,215.5 -0.587,215.551 -0.966,215.653 -1.33,215.804 -1.67,216 -1.982,216.24 -2.26,216.518 -2.5,216.83 -2.696,217.17 -2.847,217.534 -2.949,217.913 -3,218.303 -3,218.5 -3,218.697 -2.949,219.087 -2.847,219.466 -2.696,219.83 -2.5,220.17 -2.26,220.482 -1.982,220.76 -1.67,221 -1.33,221.196 -0.966,221.347 -0.587,221.449 -0.197,221.5 0,221.5 0.197,221.5 0.587,221.449 0.966,221.347 1.33,221.196 1.67,221 1.982,220.76 2.26,220.482 2.5,220.17 2.696,219.83 2.847,219.466 2.949,219.087 3,218.697 3,218.5 3,218.303 2.949,217.913 2.847,217.534 2.696,217.17 2.5,216.83 2.26,216.518 1.982,216.24 1.67,216 1.33,215.804 0.966,215.653 0.587,215.551 0.197,215.5

## Silkscreen, mask and mechanical layers (free items; w line width, h text height)
Top Overlay:
  circle w0.1: c171.254,106.379 r3
  circle w0.1: c-177.754,95.121 r3
  circle w0.1: c218.5,6 r3
  circle w0.1: c109.25,189.227 r3
  circle w0.1: c-218.5,6 r3
  circle w0.1: c-109.25,189.227 r3
  circle w0.1: c0,218.5 r3
  text "www.tissaphern.com" at -43.562,197.814 h9.5